# EAGLE board electric_sheep-v11 (EAGLE 5.11)
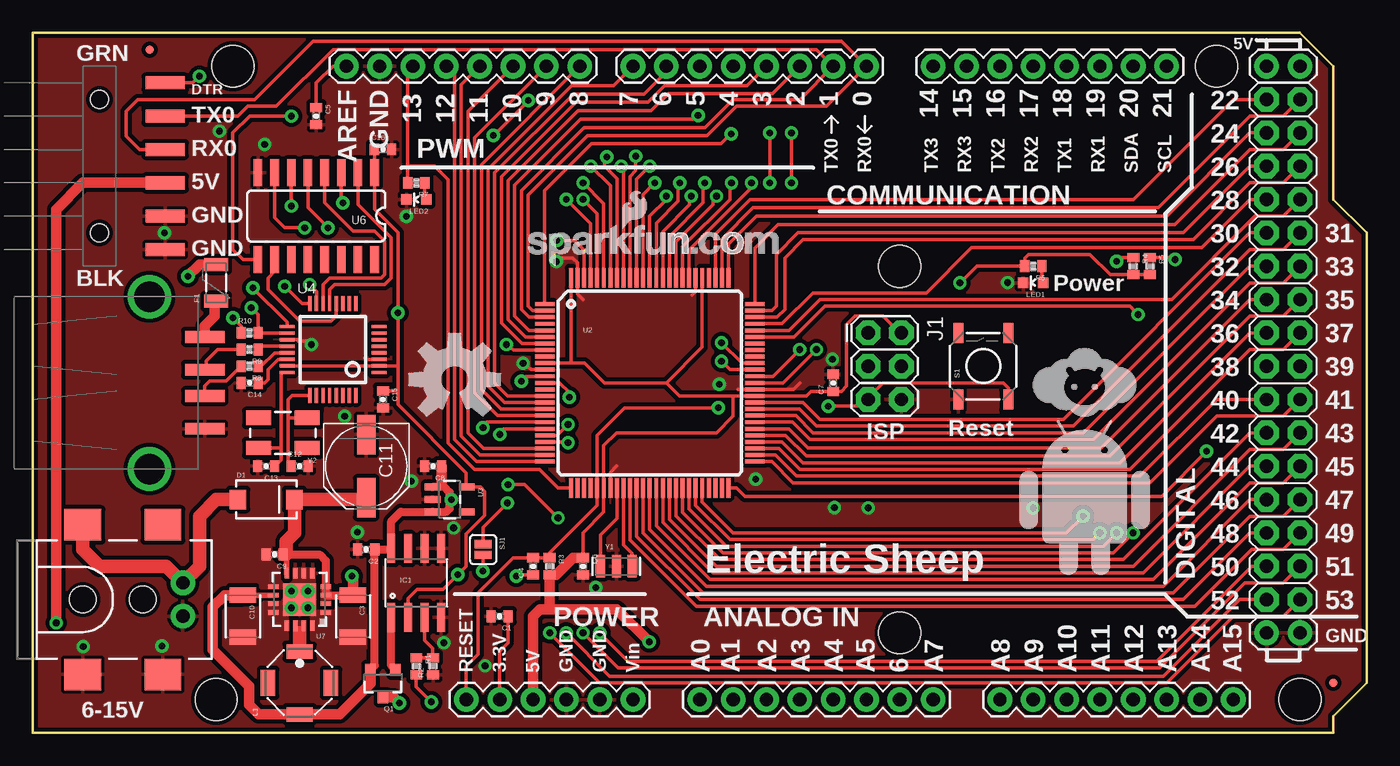
[diagram p0: board, top side]
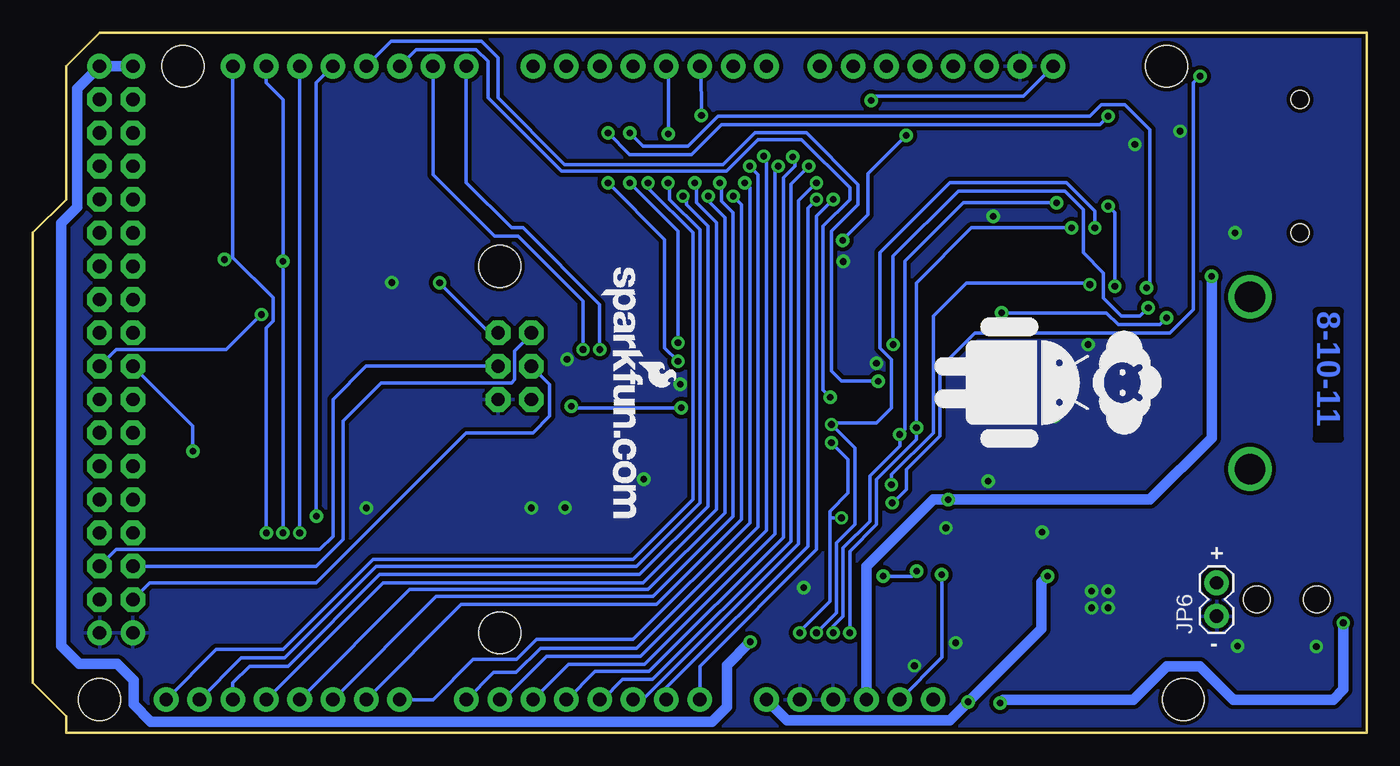
[diagram p1: board, bottom side, seen from below]

Size 101.6 x 53.34 mm. Coordinates in mm from the lower left corner, seen from the top.
Copper layers (1*16): Top 0.035mm / dielectric 1.5mm / Bottom 0.035mm
Design rules "SparkFun": minimum track width 8mil, minimum drill 20mil, track to track 8mil, track to pad 8mil, pad to pad 8mil, via to via 8mil, smd to smd 8mil, copper to edge 8mil, drill to drill 8mil, minimum pad ring 12mil, minimum via ring 10mil, stop-mask expansion 4mil, vias tented up to drill 20mil, thermal gap 10mil

## Footprints (pad centres in the part's own frame; a part is rotated, then mirrored left to right if it is on the bottom)
0402-CAP = smd 0.7 x 0.9: 1 -0.65,0; 2 0.65,0
1210 = smd 1.2 x 2: 1 -1.6,0; 2 1.6,0
PANASONIC_D = smd 3 x 1.4: + 2.4,0; - -2.4,0
SMA-DIODE = smd 1.27 x 1.47: A -2.15,0; C 2.15,0
PTC-1206 = smd 1 x 1.8: 1 -1.4,0; 2 1.4,0
SO08 = smd 0.61 x 2.21: 1 -1.905,-2.616; 2 -0.635,-2.616; 3 0.635,-2.616; 4 1.905,-2.616; 5 1.905,2.616; 6 0.635,2.616; 7 -0.635,2.616; 8 -1.905,2.616
2X3 = drill 1.016 pad 1.88 octagon: 1 0,0; 2 0,2.54; 3 2.54,0; 4 2.54,2.54; 5 5.08,0; 6 5.08,2.54
POWER_JACK_SMD = smd 2.8 x 2.4: GND 0,-5.7; P$4 6.1,-5.7; VIN0 0,5.7; VIN1 6.1,5.7 | hole 2.032: 0,0; 4.572,0
1X06-SMD = smd 1 x 3: 1 -6.35,5; 2 -3.81,5; 3 -1.27,5; 4 1.27,5; 5 3.81,5; 6 6.35,5 | hole 1.4: -5.08,0; 5.08,0
FIDUCIAL-1X2.5 = smd 0.635 x 0.635: 1 0,0
1X02 = drill 1.016 pad 1.88 round: 1 0,0; 2 2.54,0
SRU5028 = smd 1.1 x 2: 1 2.4,0; 2 -2.4,0 | smd 2 x 1.1: P$1 0,2.4; P$2 0,-2.4
LED-0603 = smd 0.8 x 0.8: A 0,-0.75; C 0,0.75
SOT23-3 = smd 0.8 x 0.9: 1 -0.95,-1; 2 0.95,-1; 3 0,1.1
0402-RES = smd 0.7 x 0.9: 1 -0.65,0; 2 0.65,0
TACTILE_SWITCH_SMD = smd 1.524 x 0.762: 1 -2.54,1.905; 2 2.54,1.905; 3 -2.54,-1.905; 4 2.54,-1.905
SJ_2S = smd 0.635 x 1.27: 1 -0.412,0; 2 0.412,0
ARDUINO_MEGA = drill 1.016 pad 1.88 round: 0 63.5,50.8; 1 60.96,50.8; 2 58.42,50.8; 3 55.88,50.8; 3.3V 35.56,2.54; 4 53.34,50.8; 5 50.8,50.8; 5V@0 38.1,2.54; 5V@1 93.98,50.8; 5V@2 96.52,50.8; 6 48.26,50.8; 7 45.72,50.8; 8 41.656,50.8; 9 39.116,50.8; 10 36.576,50.8; 11 34.036,50.8; 12 31.496,50.8; 13 28.956,50.8; 14 68.58,50.8; 15 71.12,50.8; 16 73.66,50.8; 17 76.2,50.8; 18 78.74,50.8; 19 81.28,50.8; 20 83.82,50.8; 21 86.36,50.8; A0 50.8,2.54; A1 53.34,2.54; A2 55.88,2.54; A3 58.42,2.54; A4 60.96,2.54; A5 63.5,2.54; A6 66.04,2.54; A7 68.58,2.54; A8 73.66,2.54; A9 76.2,2.54; A10 78.74,2.54; A11 81.28,2.54; A12 83.82,2.54; A13 86.36,2.54; A14 88.9,2.54; A15 91.44,2.54; AREF 23.876,50.8; GND@0 40.64,2.54; GND@1 43.18,2.54; GND@2 93.98,7.62; GND@3 96.52,7.62; GND@4 26.416,50.8; RESET 33.02,2.54; VIN 45.72,2.54 | drill 1.016 pad 1.88 octagon: 22 93.98,48.26; 23 96.52,48.26; 24 93.98,45.72; 25 96.52,45.72; 26 93.98,43.18; 27 96.52,43.18; 28 93.98,40.64; 29 96.52,40.64; 30 93.98,38.1; 31 96.52,38.1; 32 93.98,35.56; 33 96.52,35.56; 34 93.98,33.02; 35 96.52,33.02; 36 93.98,30.48; 37 96.52,30.48; 38 93.98,27.94; 39 96.52,27.94; 40 93.98,25.4; 41 96.52,25.4; 42 93.98,22.86; 43 96.52,22.86; 44 93.98,20.32; 45 96.52,20.32; 46 93.98,17.78; 47 96.52,17.78; 48 93.98,15.24; 49 96.52,15.24; 50 93.98,12.7; 51 96.52,12.7; 52 93.98,10.16; 53 96.52,10.16 | hole 3.2: 15.24,50.8; 13.97,2.54; 66.04,35.56; 66.04,7.62; 90.17,50.8; 96.52,2.54
TQFP100 = smd 1.5 x 0.3: 1 -8,6; 2 -8,5.5; 3 -8,5; 4 -8,4.5; 5 -8,4; 6 -8,3.5; 7 -8,3; 8 -8,2.5; 9 -8,2; 10 -8,1.5; 11 -8,1; 12 -8,0.5; 13 -8,0; 14 -8,-0.5; 15 -8,-1; 16 -8,-1.5; 17 -8,-2; 18 -8,-2.5; 19 -8,-3; 20 -8,-3.5; 21 -8,-4; 22 -8,-4.5; 23 -8,-5; 24 -8,-5.5; 25 -8,-6; 51 8,-6; 52 8,-5.5; 53 8,-5; 54 8,-4.5; 55 8,-4; 56 8,-3.5; 57 8,-3; 58 8,-2.5; 59 8,-2; 60 8,-1.5; 61 8,-1; 62 8,-0.5; 63 8,0; 64 8,0.5; 65 8,1; 66 8,1.5; 67 8,2; 68 8,2.5; 69 8,3; 70 8,3.5; 71 8,4; 72 8,4.5; 73 8,5; 74 8,5.5; 75 8,6 | smd 0.3 x 1.5: 26 -6,-8; 27 -5.5,-8; 28 -5,-8; 29 -4.5,-8; 30 -4,-8; 31 -3.5,-8; 32 -3,-8; 33 -2.5,-8; 34 -2,-8; 35 -1.5,-8; 36 -1,-8; 37 -0.5,-8; 38 0,-8; 39 0.5,-8; 40 1,-8; 41 1.5,-8; 42 2,-8; 43 2.5,-8; 44 3,-8; 45 3.5,-8; 46 4,-8; 47 4.5,-8; 48 5,-8; 49 5.5,-8; 50 6,-8; 76 6,8; 77 5.5,8; 78 5,8; 79 4.5,8; 80 4,8; 81 3.5,8; 82 3,8; 83 2.5,8; 84 2,8; 85 1.5,8; 86 1,8; 87 0.5,8; 88 0,8; 89 -0.5,8; 90 -1,8; 91 -1.5,8; 92 -2,8; 93 -2.5,8; 94 -3,8; 95 -3.5,8; 96 -4,8; 97 -4.5,8; 98 -5,8; 99 -5.5,8; 100 -6,8
SOT23-5 = smd 0.55 x 1.2: 1 -0.95,-1.3; 2 0,-1.3; 3 0.95,-1.3; 4 0.95,1.3; 5 -0.95,1.3
TQFP32-5MM = smd 1.143 x 0.254: 1 -3.5,1.75; 2 -3.5,1.25; 3 -3.5,0.75; 4 -3.5,0.25; 5 -3.5,-0.25; 6 -3.5,-0.75; 7 -3.5,-1.25; 8 -3.5,-1.75; 17 3.5,-1.75; 18 3.5,-1.25; 19 3.5,-0.75; 20 3.5,-0.25; 21 3.5,0.25; 22 3.5,0.75; 23 3.5,1.25; 24 3.5,1.75 | smd 0.254 x 1.143: 9 -1.75,-3.5; 10 -1.25,-3.5; 11 -0.75,-3.5; 12 -0.25,-3.5; 13 0.25,-3.5; 14 0.75,-3.5; 15 1.25,-3.5; 16 1.75,-3.5; 25 1.75,3.5; 26 1.25,3.5; 27 0.75,3.5; 28 0.25,3.5; 29 -0.25,3.5; 30 -0.75,3.5; 31 -1.25,3.5; 32 -1.75,3.5
SO016 = smd 0.66 x 2.032: 1 -4.445,-3.315; 2 -3.175,-3.315; 3 -1.905,-3.315; 4 -0.635,-3.315; 5 0.635,-3.315; 6 1.905,-3.315; 7 3.175,-3.315; 8 4.445,-3.315; 9 4.445,3.315; 10 3.175,3.315; 11 1.905,3.315; 12 0.635,3.315; 13 -0.635,3.315; 14 -1.905,3.315; 15 -3.175,3.315; 16 -4.445,3.315
QFN16-4X4 = smd 0.8 x 0.35: 1 -2,0.975; 2 -2,0.325; 3 -2,-0.325; 4 -2,-0.975; 9 2,-0.975; 10 2,-0.325; 11 2,0.325; 12 2,0.975 | smd 0.35 x 0.8: 5 -0.975,-2; 6 -0.325,-2; 7 0.325,-2; 8 0.975,-2; 13 0.975,2; 14 0.325,2; 15 -0.325,2; 16 -0.975,2 | smd 2.5 x 2.5: EXP 0,0
USB-A-S-NOSILK-FEMALE = smd 3 x 0.9: D+ 4.212,-1; D- 4.212,1; GND 4.212,-3.5; VBUS 4.212,3.5 | drill 2.311 round: P$5 0,-6.566; P$6 0,6.566
RESONATOR-SMD = smd 0.7 x 1.7: 1 -1.2,0; 2 0,0; 3 1.2,0
CRYSTAL-SMD-5X3 = smd 1.9 x 1.1: 1 -1.85,-1.15; 2 1.85,-1.15; 3 1.85,1.15; 4 -1.85,1.15

## Placement (x,y rotation side)
C1  1uF  [0402-CAP]  35.56,8.89 180 top
C2  0.1uF  [0402-CAP]  25.4,13.97 180 top
C3  10uF  [1210]  24.38,8.89 270 top
C4  0.1uF  [0402-CAP]  38.1,12.7 90 top
C5  0.1uF  [0402-CAP]  21.59,46.99 270 top
C6  0.1uF  [0402-CAP]  41.91,12.7 270 top
C7  0.1uF  [0402-CAP]  60.96,26.67 90 top
C8  0.1uF  [0402-CAP]  30.48,20.32 180 top
C9  1uF  [0402-CAP]  18.41,13.59 180 top
C10  22uF  [1210]  16,8.89 270 top
C11  47uF  [PANASONIC_D]  25.4,20.32 270 top
C12  18pF  [0402-CAP]  20.32,20.32 0 top
C13  18pF  [0402-CAP]  17.78,20.32 180 top
C14  0.1uF  [0402-CAP]  16.51,26.67 180 top
C15  0.1uF  [0402-CAP]  26.67,25.4 270 top
C16  0.1uF  [0402-CAP]  26.67,44.45 0 top
D1  MBRA140  [SMA-DIODE]  17.78,17.78 0 top
F1  PTCSMD  [PTC-1206]  13.97,34.29 90 top
IC1  OPAMP-DUALU  [SO08]  29.21,11.43 0 top
J1  AVR_SPI_PRG_6PTH  [2X3]  63.63,30.48 270 top
J2  POWER_JACKSMD  [POWER_JACK_SMD]  3.81,10.16 0 top
JP1  FTDI  [1X06-SMD]  5.08,43.18 270 top
JP2  LOGO-SFENEW  [SFE-NEW-WEBLOGO]  37.72,35.56 0 top
JP3  LOGO-SFENEW  [SFE-NEW-WEBLOGO]  58.29,35.43 270 bottom
JP4  FIDUCIAL1X2.5  [FIDUCIAL-1X2.5]  8.89,52.07 0 top
JP5  FIDUCIAL1X2.5  [FIDUCIAL-1X2.5]  99.06,3.81 0 top
JP6  External  [1X02]  11.43,8.89 90 bottom
L1  10uH/1.8A  [SRU5028]  20.32,3.81 90 top
LED1  green  [LED-0603]  76.2,34.29 90 top
LED2  yellow  [LED-0603]  29.21,40.64 90 top
Q1  MOSFET-PCHANNELSMD  [SOT23-3]  26.67,3.81 180 top
R1  10k  [0402-RES]  29.21,5.08 270 top
R2  10k  [0402-RES]  30.48,5.08 90 top
R3  10k  [0402-RES]  39.37,12.7 270 top
R4  10k  [0402-RES]  83.82,35.56 270 top
R5  10k  [0402-RES]  85.09,35.56 270 top
R6  470  [0402-RES]  76.2,35.56 180 top
R7  470  [0402-RES]  29.21,41.91 180 top
R8  33  [0402-RES]  16.51,27.94 180 top
R9  33  [0402-RES]  16.51,29.21 180 top
R10  2.2k  [0402-RES]  16.51,30.48 0 top
S1  SWITCH-MOMENTARY-2SMD  [TACTILE_SWITCH_SMD]  72.39,27.94 90 top
SJ1  SOLDERJUMPERNC  [SJ_2S]  34.29,13.97 270 top
U1  ARDUINO-MEGAFULL  [ARDUINO_MEGA]  0,0 0 top
U2  ATMEGA2560AU  [TQFP100]  46.99,26.67 0 top
U3  V_REG_LDOSMD  [SOT23-5]  31.75,17.78 270 top
U4  MAX3421ESMD  [TQFP32-5MM]  22.86,29.21 180 top
U6  HEX_CONVERTER  [SO016]  21.59,39.37 180 top
U7  TPS6211  [QFN16-4X4]  20.32,10.16 180 top
U$1  OSHW-LOGOL  [OSHW-LOGO-L]  32.13,26.92 0 top
U$14  ANDROID-ELECTRIC_SHEEP_LOGO_  [ANDROID-ELECTRIC_SHEEP_LOGO]  33.02,31.75 270 bottom
U$15  ANDROID-ELECTRIC_SHEEP_LOGO_  [ANDROID-ELECTRIC_SHEEP_LOGO]  75.06,11.94 0 top
X1  USB-A-SMD  [USB-A-S-NOSILK-FEMALE]  8.89,26.67 0 top
Y1  RESONATORSMD  [RESONATOR-SMD]  44.45,12.7 0 top
Y2  12MHz  [CRYSTAL-SMD-5X3]  19.05,22.86 180 top

## Library data of the parts
C1-C16 D1 F1 IC1 J1 J2 JP1-JP3 JP6 L1 LED1 LED2 Q1 R1-R10 S1 SJ1 U1-U4 U6 U7 U$1 U$14 U$15 X1 Y1 Y2 = SparkFun
JP4 JP5 = abes

## Nets
3.3V: C1.1 C15.1 C16.1 IC1.2 R10.1 U1.3.3V U3.5 U4.2 U4.23 U6.1
5V: C2.1 C6.1 C7.1 C8.1 C10.1 F1.2 IC1.8 J1.2 L1.2 Q1.2 R3.2 R4.2 R5.2 R6.2 U1.5V@0 U1.5V@1 U1.5V@2 U2.10 U2.31 U2.61 U2.80 U2.100 U3.1 U3.3 U7.10
A0: U1.A0 U2.97
A1: U1.A1 U2.96
A2: U1.A2 U2.95
A3: U1.A3 U2.94
A4: U1.A4 U2.93
A5: U1.A5 U2.92
A6: U1.A6 U2.91
A7: U1.A7 U2.90
A8: U1.A8 U2.89
A9: U1.A9 U2.88
A10: U1.A10 U2.87
A11: U1.A11 U2.86
A12: U1.A12 U2.85
A13: U1.A13 U2.84
A14: U1.A14 U2.83
A15: U1.A15 U2.82
AREF: C5.1 U1.AREF U2.98
DTR: JP1.1 SJ1.1
GND: C1.2 C2.2 C3.2 C5.2 C6.2 C7.2 C8.2 C9.2 C10.2 C11.- C12.2 C13.2 C14.2 C15.2 C16.2 IC1.4 IC1.5 IC1.6 J1.6 J2.GND J2.P$4 JP1.5 JP1.6 JP6.1 LED1.C LED2.C R2.1 S1.1 U1.GND@0 U1.GND@1 U1.GND@2 U1.GND@3 U1.GND@4 U2.11 U2.32 U2.62 U2.81 U2.99 U3.2 U4.3 U4.19 U6.8 U7.1 U7.5 U7.6 U7.7 U7.9 U7.11 U7.12 U7.13 U7.16 U7.EXP X1.GND Y1.2
MOSI-3: U4.16 U6.6
N$1: IC1.3 R1.1 R2.2
N$2: LED1.A R6.1
N$3: LED2.A R7.1
N$4: C4.1 SJ1.2
N$5: IC1.1 Q1.1
N$11: L1.1 U7.14 U7.15
N$13: R8.1 U4.21
N$14: R9.1 U4.20
N$15: R9.2 X1.D-
N$16: R8.2 X1.D+
N$18: F1.1 X1.VBUS
N$19: C12.1 U4.25 Y2.1
N$20: C13.1 U4.24 Y2.3
N$73: U2.33 Y1.1
N$74: U2.34 Y1.3
PA0: U1.22 U2.78
PA1: U1.23 U2.77
PA2: U1.24 U2.76
PA3: U1.25 U2.75
PA4: U1.26 U2.74
PA5: U1.27 U2.73
PA6: U1.28 U2.72
PA7: U1.29 U2.71
PB0: U1.53 U2.19 U6.5
PB1: J1.3 U1.52 U2.20 U6.3
PB2: J1.4 U1.51 U2.21 U6.7
PB3: J1.1 U1.50 U2.22 U4.15
PB4: U1.10 U2.23
PB5: U1.11 U2.24
PB6: U1.12 U2.25
PB7: R7.2 U1.13 U2.26
PC0: U1.37 U2.53
PC1: U1.36 U2.54
PC2: U1.35 U2.55
PC3: U1.34 U2.56
PC4: U1.33 U2.57
PC5: U1.32 U2.58
PC6: U1.31 U2.59
PC7: U1.30 U2.60
PD7: U1.38 U2.50
PE3: U1.5 U2.5
PE4: U1.2 U2.6
PE5: U1.3 U2.7
PE6: R10.2 U2.8 U4.18
PG0: U1.41 U2.51
PG1: U1.40 U2.52
PG2: U1.39 U2.70
PG5: U1.4 U2.1
PH3: U1.6 U2.15
PH4: U1.7 U2.16
PH5: U1.8 U2.17
PH6: U1.9 U2.18
PJ2: U2.65 U6.9
PJ3: U2.66 U4.17
PL0: U1.49 U2.35
PL1: U1.48 U2.36
PL2: U1.47 U2.37
PL3: U1.46 U2.38
PL4: U1.45 U2.39
PL5: U1.44 U2.40
PL6: U1.43 U2.41
PL7: U1.42 U2.42
PWRIN: D1.A J2.VIN0 JP6.2
RES-3: U4.12 U6.10
RESET: C4.2 J1.5 R3.1 S1.3 U1.RESET U2.30
RX0: JP1.3 U1.0 U2.2
RX1: U1.19 U2.45
RX2: U1.17 U2.12
RX3: U1.15 U2.63
SCK-3: U4.13 U6.2
SCL: R5.1 U1.21 U2.43
SDA: R4.1 U1.20 U2.44
SS-3: U4.14 U6.4
TX0: JP1.2 U1.1 U2.3
TX1: U1.18 U2.46
TX2: U1.16 U2.13
TX3: U1.14 U2.64
USBVCC: JP1.4 Q1.3
VBCOMP: C14.1 U4.22
VIN: C3.1 C9.1 C11.+ D1.C R1.2 U1.VIN U7.2 U7.3 U7.4 U7.8

## Tracks (layer width: path | path; a pad name or v marks a point on that pad's centre or on a via)
3.3V  (via drill 0.51)
  Top 0.254: 26.02,42.7 C16.1 | 26.02,42.7 U6.1 | 26.02,42.7 26.02,39.89 27.81,38.1 v27.81,32 27.81,27.94 | C15.1 26.68,26.04 27.81,26.04 | C1.1 36.21,6.87 35.56,6.22 U1.3.3V | 27.81,26.04 27.81,27.94 | 27.81,26.04 27.81,25.02 33.02,19.81 33.02,18.76 U3.5 34.1,18.73 34.42,18.41 34.42,16.59 32.99,15.16 32.99,12.68 v32.38,12.06 31.24,10.92 29.26,10.92 28.57,10.24 IC1.2 | R10.1 15.86,31 v15.24,31.62 | 27.81,27.94 27.79,27.96 U4.2 U4.23
  Bottom 0.254: v27.81,32 19.81,32 18.92,31.11 15.75,31.11 v15.24,31.62 | U1.3.3V 32.36,5.74 32.36,12.04 v32.38,12.06
5V  (via drill 0.51)
  Top 0.203: 31.36,18.73 31.13,18.96
  Top 0.254: R5.2 R4.2 82.06,34.91 80.52,36.45 75.82,36.45 75.56,36.2 75.56,35.58 | 75.56,35.58 71.9,35.58 v70.61,34.29 | 40.97,28.17 42.04,28.17 43.54,26.67 48.26,26.67 | 48.26,26.67 49.26,25.67 53.34,25.67 | 48.26,26.67 50.99,29.4 U2.80 | C6.1 41.91,15.24 43.49,16.82 U2.31 43.49,21.9 44.45,22.86 52.07,22.86 53.34,24.13 53.34,25.67 | U2.100 40.99,28.19 40.97,28.17 | 40.97,28.17 U2.10 | 53.34,25.67 U2.61 58.91,25.67 59.26,26.02 C7.1 61.58,26.02 61.98,26.42 61.98,31.11 62.61,31.75 64.77,31.75 66.04,30.48 J1.2 | 31.75,18.34 31.75,17.91 v31.88,17.78 | 75.56,35.58 R6.2
  Top 0.406: U7.10 C10.1
  Top 0.61: U3.1 31.36,18.73 31.75,18.34 31.75,17.09 31.5,16.84 U3.3 | U3.3 | U3.3 28.02,16.84 27.3,16.13 IC1.8 27.23,13.97 C2.1 26.05,5.14 Q1.2
  Top 0.813: C6.1 41.16,13.35 39.86,12.05 R3.2 39.37,9.42 | F1.2 12.7,35.69 v11.81,34.8 | C10.1 14.6,10.48 13.72,9.6 13.72,6.33 16.48,3.56 16.48,2.13 17.21,1.41 L1.2 23.36,1.41 25.72,3.77 Q1.2 | 31.13,18.96 C8.1 | v46.97,6.93 44.48,9.42 39.37,9.42 | 39.37,9.42 38.63,9.42 38.1,8.89 U1.5V@0
  Bottom 0.254: v70.61,34.29 66.8,30.48 J1.2
  Bottom 0.813: U1.5V@1 U1.5V@2 98.22,49.1 98.22,40.06 99.44,38.84 99.44,6.63 98.07,5.26 95.17,5.26 93.93,4.01 93.93,2.18 92.61,0.86 49.89,0.86 48.74,2.01 48.74,5.16 v46.97,6.93 | v11.81,34.8 11.81,22.48 16.51,17.78 v31.88,17.78 33.02,17.78 38.1,12.7 U1.5V@0
A0  (via drill 0.51)
  Top 0.254: U2.97 42.49,38.79 v40.64,40.64
  Bottom 0.254: U1.A0 50.8,5.08 41.91,13.97 41.91,39.37 v40.64,40.64
A1  (via drill 0.51)
  Top 0.254: U2.96 42.99,39.56 v41.91,40.64
  Bottom 0.254: U1.A1 53.34,3.45 42.57,14.22 42.57,39.98 v41.91,40.64
A2  (via drill 0.51)
  Top 0.254: U2.95 43.49,40.33 v41.91,41.91
  Bottom 0.254: U1.A2 55.14,2.54 43.28,14.4 43.28,40.54 v41.91,41.91
A3  (via drill 0.51)
  Top 0.254: U2.94 43.99,41.68 v42.49,43.18
  Bottom 0.254: U1.A3 58.19,2.54 56.67,4.06 54.41,4.06 43.87,14.61 43.87,41.81 v42.49,43.18
A4  (via drill 0.51)
  Top 0.254: U2.93 44.49,42.23 43.54,43.18 43.54,43.71 v43.71,43.89
  Bottom 0.254: U1.A4 60.91,2.54 58.78,4.67 54.66,4.67 44.42,14.91 44.42,42.29 43.54,43.18 43.54,43.71 v43.71,43.89
A5  (via drill 0.51)
  Top 0.254: U2.92 44.99,43.02 v44.83,43.18
  Bottom 0.254: U1.A5 60.81,5.23 55.02,5.23 45.09,15.16 45.09,42.93 v44.83,43.18
A6  (via drill 0.51)
  Top 0.254: U2.91 45.49,42.39 45.92,42.82 v45.92,43.94
  Bottom 0.254: U1.A6 65.79,2.54 62.48,5.84 55.32,5.84 45.72,15.44 45.72,43.74 v45.92,43.94
A7  (via drill 0.51)
  Top 0.254: U2.90 45.99,42.18 v46.99,43.18
  Bottom 0.254: U1.A7 68.56,2.54 66.5,4.6 64.8,4.6 62.94,6.45 55.6,6.45 46.35,15.7 46.35,42.55 v46.99,43.18
A8  (via drill 0.51)
  Top 0.254: U2.89 46.49,41.03 v47.37,41.91
  Bottom 0.254: U1.A8 71.12,2.54 68.07,5.59 64.77,5.59 63.25,7.11 55.88,7.11 46.99,16 46.99,41.53 v47.37,41.91
A9  (via drill 0.51)
  Top 0.254: U2.88 46.99,39.37 48.26,40.64 v48.26,40.89
  Bottom 0.254: U1.A9 68.96,9.78 54.1,9.78 47.62,16.26 47.62,40.26 v48.26,40.89
A10  (via drill 0.51)
  Top 0.254: U2.87 47.49,38.85 49.15,40.51 49.15,41.78 v49.28,41.91
  Bottom 0.254: U1.A10 70.87,10.41 54.36,10.41 48.26,16.51 48.26,39.62 49.15,40.51 49.15,41.78 v49.28,41.91
A11  (via drill 0.51)
  Top 0.254: U2.86 47.99,38.21 50.04,40.26 50.04,40.77 v50.16,40.89
  Bottom 0.254: U1.A11 72.9,10.92 54.74,10.92 48.9,16.76 48.9,39.24 50.04,40.39 50.04,40.77 v50.16,40.89
A12  (via drill 0.51)
  Top 0.254: U2.85 48.49,37.82 51.05,40.39 51.05,41.78 v51.18,41.91
  Bottom 0.254: U1.A12 74.93,11.43 55.12,11.43 49.53,17.02 49.53,38.86 51.05,40.39 51.05,41.78 v51.18,41.91
A13  (via drill 0.51)
  Top 0.254: U2.84 48.99,37.43 51.82,40.26 51.82,40.64 v52.07,40.89
  Bottom 0.254: U1.A13 86.36,3.81 85.09,5.08 82.17,5.08 75.18,12.06 55.37,12.06 50.16,17.27 50.16,38.61 51.82,40.26 51.82,40.64 v52.07,40.89
A14  (via drill 0.51)
  Top 0.254: U2.83 49.49,37.04 53.09,40.64 53.09,41.78 v53.21,41.91
  Bottom 0.254: U1.A14 85.72,5.71 82.42,5.71 75.44,12.7 55.63,12.7 50.8,17.53 50.8,38.35 53.09,40.64 53.09,41.78 v53.21,41.91
A15  (via drill 0.51)
  Top 0.254: U2.82 49.99,36.78 54.74,41.53 v54.74,41.91
  Bottom 0.254: U1.A15 87.63,6.35 82.55,6.35 75.69,13.21 55.88,13.21 51.31,17.78 51.31,38.1 54.61,41.4 54.61,41.78 v54.74,41.91
AREF  (via drill 0.51)
  Top 0.254: 40.18,37.52 v39.9,37.52 41.27,37.52 41.99,36.8 U2.98 | C5.1 21.59,49.53 22.86,50.8 U1.AREF | v37.74,48.18 v35.08,45.52
  Bottom 0.254: v39.9,37.52 39.9,37.57 37.97,39.5 37.97,42.62 v35.08,45.52 | U1.AREF 26.16,48.51 37.41,48.51 v37.74,48.18
DTR  (via drill 0.51)
  Top 0.254: SJ1.1 34.29,15.67 v36.14,17.53 | JP1.1 12.19,49.53 v12.7,50.04
  Bottom 0.254: v36.14,17.53 36.07,17.53 35.05,18.54 35.05,20.07 32.51,22.61 32.51,27.81 29.84,30.48 14.99,30.48 13.21,32.26 13.21,49.53 v12.7,50.04
GND  (via drill 0.51)
  Top 0.254: U2.32 43.99,19.86 44.45,20.32 | 53.72,26.16 53.73,26.17 U2.62 57.92,26.17 58.42,26.67 | 41.91,33.02 41.49,33.44 U2.99 41.49,35.83 41.12,36.2 40.31,36.2 40.11,35.99 40.08,35.99 40.01,35.92 | U2.81 50.49,33.62 50.22,33.35 | U2.11 37.96,27.67 v37.34,28.17 | U4.19 20.08,29.96 20.19,29.84 21.08,29.84 v21.21,29.59 | U4.3 25.39,28.46 25.27,28.57
  other vias: 34.44,5.11 39.88,35.92 42.88,11.07 55.07,19.33 74.24,34.32 60.91,28.47 63.63,17.14 61.06,17.17 76.2,17.14 28.45,39.34 52.27,26.57 23.75,24.13 17.65,44.83 10.03,38.1 14.22,45.85 19.68,10.79 20.95,10.79 19.68,9.53 20.95,9.53 3.84,6.58 9.83,6.6 32.05,15.62 28.83,19.18 31.32,6.86 24.71,15.29
  pour Bottom (isolate 0.305): 0,53.34 100.33,53.34 101.6,52.07 101.6,1.27 100.33,0 0,0
  pour Top (isolate 0.305): 0,53.34 100.33,53.34 101.6,52.07 101.6,1.27 100.33,0 0,0
  pour Top (no thermals): 19.86,12.52 19.86,11.61 19.63,11.38 19.63,10.82 19.76,10.69 20.9,10.69 21.46,11.25 21.46,12.52
  pour Top (no thermals): 19.23,11 17.4,11 17.3,11.1 17.3,12.14 16.74,12.7 16.74,14.48 16.89,14.63 17.91,14.63 18.16,14.38 18.16,13.23 18.8,12.6 18.8,11.68 19.23,11.25
  pour Top (no thermals): 19.2,9.98 17.58,9.98 17.12,9.53 16.1,9.53 14.63,8.05 14.63,6.53 15.16,5.99 18.03,5.99 19.15,7.11 19.41,7.11 19.41,9.68
  pour Top (no thermals): 21.21,9.3 21.21,7.16 21.26,7.06 21.46,7.06 22.07,6.45 25.4,6.45 25.37,8.94 24.99,9.32
MOSI-3  (via drill 0.51)
  Top 0.254: v19.68,40.13 U6.6 | U4.16 20.5,32.71 v19.18,34.04
  Bottom 0.254: 19.56,40.01 v19.68,40.13 19.18,39.62 v19.18,34.04
N$1
  Top 0.254: IC1.3 29.84,7.04 30.45,6.43 30.45,5.75 R2.2 R1.1
N$2
  Top 0.254: R6.1 76.85,34.39 LED1.A
N$3
  Top 0.254: R7.1 29.86,40.74 LED2.A
N$4  (via drill 0.51)
  Top 0.254: C4.1 36.94,12.05 v36.83,11.94 | SJ1.2 34.29,12.34 v34.27,12.32
  Bottom 0.254: v36.83,11.94 34.65,11.94 v34.27,12.32
N$5
  Top 0.61: IC1.1 27.3,5.12 Q1.1
N$11
  Top 0.254: U7.14 20,7.95 20.32,7.62 20.64,7.95 U7.15
  Top 1.016: 20.32,7.62 L1.1
  pour Top (no thermals): 19.89,8.48 19.89,6.63 20.78,6.63 20.78,6.65 20.75,6.68 20.75,8.48
N$13
  Top 0.254: U4.21 18.42,28.96 17.4,27.94 R8.1
N$14
  Top 0.254: U4.20 17.41,29.46 R9.1
N$15
  Top 0.254: R9.2 14.1,29.21 13.21,28.32 13.21,27.78 X1.D-
N$16
  Top 0.254: X1.D+ 13.1,26.44 13.46,26.8 14.72,26.8 R8.2
N$18
  Top 0.406: 13.84,33.02 F1.1
  Top 0.813: X1.VBUS 13.1,31.01 13.84,31.75 13.84,33.02
N$19
  Top 0.254: U4.25 19.74,25.71 19.43,25.4 19.43,24 | 19.43,24 19.43,20.56 C12.1 | Y2.1 19.44,24.01 19.43,24
N$20
  Top 0.254: U4.24 18.95,27.46 18.92,27.43 18.92,21.59 | 18.92,21.59 18.92,20.81 C13.1 | Y2.3 18.8,21.71 18.92,21.59
N$73
  Top 0.203: Y1.1 43.23,12.72
  Top 0.254: U2.33 44.49,16.35 43.23,15.09 43.23,12.72
N$74
  Top 0.254: U2.34 44.99,14.32 45.65,13.66 Y1.3
PA0
  Top 0.254: U2.78 51.99,38.02 54.61,40.64 83.82,40.64 91.44,48.26 U1.22
PA1
  Top 0.254: U2.77 52.49,37.63 54.86,40.01 85.72,40.01 92.71,46.99 95.25,46.99 U1.23
PA2
  Top 0.254: U2.76 52.99,37.24 55.12,39.37 86.36,39.37 92.71,45.72 U1.24
PA3
  Top 0.254: U2.75 54.99,36.96 56.77,38.73 87,38.73 92.71,44.45 95.25,44.45 U1.25
PA4
  Top 0.254: U2.74 56.3,32.17 56.64,32.51 56.64,36.45 58.29,38.1 87.63,38.1 92.71,43.18 U1.26
PA5
  Top 0.254: U2.73 56.69,31.67 57.28,32.26 57.28,36.2 58.67,37.59 88.39,37.59 92.71,41.91 95.25,41.91 U1.27
PA6
  Top 0.254: U2.72 57.08,31.17 59.44,33.53 68.07,33.53 71.5,36.96 89.03,36.96 92.71,40.64 U1.28
PA7
  Top 0.254: U2.71 57.59,30.67 59.94,33.02 86.74,33.02 93.09,39.37 95.25,39.37 U1.29
PB0  (via drill 0.51)
  Top 0.254: U2.19 34.59,23.67 v34.29,23.24 | U1.53 95.25,8.89 91.44,8.89 86.36,3.81 43.18,3.81 v39.37,7.62 | U6.5 20.95,40.01 v22.48,38.48
  Bottom 0.254: v39.37,7.62 39.37,13.84 37.34,15.88 37.34,19.3 34.29,22.35 v34.29,23.24 34.29,34.29 30.1,38.48 v22.48,38.48
PB1  (via drill 0.51)
  Top 0.254: U2.20 35.87,23.17 v35.56,22.73 | U1.52 91.95,10.16 86.11,4.32 43.94,4.32 v40.64,7.62 | U6.3 23.5,40.64 v23.62,40.39
  Bottom 0.254: v40.64,7.62 40.64,8.13 39.88,8.89 39.88,14.1 37.85,16.13 37.85,19.56 35.56,21.84 v35.56,22.73 35.18,23.11 35.18,35.94 30.73,40.39 v23.62,40.39 | J1.3 62.23,26.54 62.23,24.13 63.5,22.86 68.58,22.86 80.01,11.43 92.71,11.43 U1.52
PB2  (via drill 0.51)
  Top 0.254: U2.21 39.94,22.67 v40.77,23.5 | U1.51 95.25,11.43 92.33,11.43 85.85,4.95 44.58,4.95 v41.91,7.62 | U6.7 18.41,39.24 19.18,38.48 v20.7,38.48
  Bottom 0.254: v41.91,7.62 40.39,9.14 40.39,14.48 38.99,15.88 38.99,21.72 v40.77,23.5 40.64,23.62 37.34,23.62 36.2,24.77 36.2,28.45 37.08,29.34 37.08,36.58 31.75,41.91 30.1,41.91 29.21,41.91 22.86,41.91 20.7,39.75 v20.7,38.48 | J1.4 76.2,27.94 78.74,25.4 78.74,14.99 79.76,13.97 95.25,13.97 U1.51
PB3  (via drill 0.51)
  Top 0.254: U2.22 40.7,22.17 v40.77,22.1 | U1.50 92.84,12.7 85.6,5.46 45.34,5.46 v43.18,7.62 | v36.2,18.92 37.47,18.92 v40.01,16.38 | U4.15 21.61,33.63 v21.08,34.16
  Bottom 0.254: v40.77,22.1 39.5,20.83 39.5,18.29 40.89,16.89 40.89,16.51 | v43.18,7.62 43.18,7.75 40.89,10.03 40.89,16.51 | J1.1 63.63,30.35 64.9,29.08 64.9,26.92 65.15,26.67 75.06,26.67 77.98,23.75 77.98,14.73 80.01,12.7 U1.50 | v40.01,16.38 40.77,16.38 40.89,16.51 | v36.2,18.92 36.2,19.68 33.02,22.86 33.02,31.75 30.48,34.29 21.21,34.29 v21.08,34.16
PB4
  Top 0.254: 36.55,50.77 U1.10 34.29,48.51 34.06,48.28 33.15,47.37 33.15,22.86 34.34,21.67 U2.23
PB5
  Top 0.254: U2.24 34.08,21.17 32.64,22.61 32.64,49.4 U1.11
PB6
  Top 0.254: U1.12 32.13,50.16 32.13,22.35 33.81,20.67 U2.25
PB7
  Top 0.254: 28.56,43.05 R7.2 | 28.56,43.05 28.56,50.4 U1.13 | U2.26 40,18.67 38.61,20.07 33.66,20.07 31.62,22.1 31.62,42.16 30.61,43.18 28.69,43.18 28.56,43.05
PC0
  Top 0.254: U2.53 56.82,21.67 58.42,20.07 83.57,20.07 92.71,29.21 95.25,29.21 U1.37
PC1
  Top 0.254: U2.54 57.08,22.17 58.67,20.57 82.8,20.57 92.71,30.48 U1.36
PC2
  Top 0.254: U2.55 57.34,22.67 58.93,21.08 82.04,21.08 92.71,31.75 95.25,31.75 U1.35
PC3
  Top 0.254: U2.56 57.6,23.17 59.05,21.72 81.41,21.72 92.71,33.02 U1.34
PC4
  Top 0.254: U2.57 57.86,23.67 59.18,22.35 80.77,22.35 92.71,34.29 95.25,34.29 U1.33
PC5
  Top 0.254: U2.58 58.13,24.17 59.44,22.86 80.01,22.86 92.71,35.56 U1.32
PC6
  Top 0.254: U2.59 58.39,24.67 59.69,23.37 79.25,23.37 92.71,36.83 95.25,36.83 U1.31
PC7
  Top 0.254: U2.60 58.65,25.17 59.94,23.88 78.49,23.88 92.71,38.1 U1.30
PD7  (via drill 0.51)
  Top 0.254: U2.50 53.59,18.67 54.23,18.03 85.98,18.03 v89.41,21.46
  Bottom 0.254: v89.41,21.46 89.41,23.37 U1.38
PE3  (via drill 0.51)
  Top 0.254: v50.67,47.04 50.67,47.02 50.42,46.76 41.73,46.76 36.7,41.73 36.7,31.75 37.78,30.67 U2.5
  Bottom 0.254: v50.67,47.04 50.72,50.72 U1.5
PE4
  Top 0.254: U1.2 56.34,48.72 48.41,48.72 47.09,47.4 41.53,47.4 37.07,42.94 36.96,42.82 36.2,42.06 36.2,31.5 37.52,30.17 U2.6
PE5
  Top 0.254: U1.3 54.41,49.33 48.13,49.33 46.86,48.06 41.38,48.06 35.69,42.37 35.69,31.24 37.26,29.67 U2.7
PE6  (via drill 0.51)
  Top 0.254: U4.18 17.18,30.46 R10.2 17.16,31.86 v16.64,32.38 | U2.8 36.62,29.17 v36.07,29.59
  Bottom 0.254: v36.07,29.59 36.07,36.32 31.11,41.27 22.99,41.27 21.59,39.88 21.59,36.58 20.07,35.05 20.07,33.15 18.67,31.75 17.27,31.75 v16.64,32.38
PG0
  Top 0.254: U2.51 56.29,20.67 57.91,19.05 85.09,19.05 90.17,24.13 95.25,24.13 U1.41
PG1
  Top 0.254: U2.52 56.55,21.17 58.17,19.56 84.33,19.56 90.17,25.4 U1.40
PG2  (via drill 0.51)
  Top 0.254: U2.70 57.98,30.17 60.33,32.51 83.57,32.51 v84.2,31.88
  Bottom 0.254: U1.39 95.25,29.21 86.87,29.21 v84.2,31.88
PG5  (via drill 0.51)
  Top 0.254: U2.1 38.99,41.3 42.57,44.88 52.43,44.88 v53.19,45.64
  Bottom 0.254: U1.4 53.19,50.65 v53.19,45.64
PH3
  Top 0.254: 48.18,50.29 48.26,50.22 | 48.18,50.29 48.18,50.72 U1.6 | 48.18,50.29 46.56,48.67 41.17,48.67 35.18,42.67 35.18,26.67 36.18,25.67 U2.15
PH4
  Top 0.254: U1.7 44.25,49.33 41.05,49.33 34.67,42.95 34.67,26.42 35.92,25.17 U2.16
PH5
  Top 0.254: 41.68,50.77 U1.8 34.16,43.31 34.16,26.16 35.66,24.67 U2.17
PH6
  Top 0.254: 39.19,50.72 U1.9 33.66,45.34 33.66,25.91 35.39,24.17 U2.18
PJ2  (via drill 0.51)
  Top 0.254: U2.65 53.1,27.67 v52.45,28.32 | v57.78,45.72 v57.78,41.91 | v19.68,46.99 16.51,46.99 15.24,45.72 15.24,36.83 16.02,36.05 U6.9
  Bottom 0.254: v52.45,28.32 53.47,29.34 53.47,37.59 v57.78,41.91 | v19.68,46.99 20.32,46.35 49.15,46.35 51.44,44.07 56.13,44.07 v57.78,45.72
PJ3  (via drill 0.51)
  Top 0.254: U2.66 54,28.17 v52.45,29.72 | v56.13,45.72 v56.13,41.91 | U4.17 19.36,31.31 v16.76,33.91
  Bottom 0.254: v52.45,29.72 52.45,38.23 v56.13,41.91 | v56.13,45.72 55.12,44.7 51.69,44.7 49.4,46.99 21.08,46.99 20.19,47.88 18.41,47.88 16.51,45.97 16.51,34.16 v16.76,33.91
PL0
  Top 0.254: U2.35 45.49,14.71 50.55,9.65 88.52,9.65 92.84,13.97 95.25,13.97 U1.49
PL1
  Top 0.254: U2.36 45.99,14.97 50.8,10.16 87.63,10.16 92.71,15.24 U1.48
PL2
  Top 0.254: U2.37 46.49,15.23 51.05,10.67 86.87,10.67 92.71,16.51 95.25,16.51 U1.47
PL3
  Top 0.254: U2.38 46.99,15.49 51.31,11.18 86.11,11.18 92.71,17.78 U1.46
PL4
  Top 0.254: U2.39 47.49,15.76 51.56,11.68 85.34,11.68 92.71,19.05 95.25,19.05 U1.45
PL5
  Top 0.254: U2.40 47.99,16.02 51.82,12.19 84.58,12.19 92.71,20.32 U1.44
PL6
  Top 0.254: U2.41 48.49,16.28 52.07,12.7 83.82,12.7 92.71,21.59 95.25,21.59 U1.43
PL7
  Top 0.254: U2.42 48.99,16.54 52.32,13.21 83.06,13.21 92.71,22.86 U1.42
PWRIN
  Top 1.016: J2.VIN0 3.81,13.97 5.08,12.7 10.16,12.7 JP6.2 12.7,12.7 12.7,16.51 13.97,17.78 D1.A
RES-3
  Top 0.254: U4.12 23.11,31.75 22.73,31.37 20.32,31.37 17.91,33.78 17.91,34.67 18.41,35.18 U6.10
RESET  (via drill 0.51)
  Top 0.254: U1.RESET 33.02,5.08 33.91,5.97 33.91,10.67 36.59,13.35 C4.2 R3.1 39.37,13.72 42.99,17.34 U2.30 42.99,22.67 45.09,24.77 v52.2,24.77 | S1.3 74.3,26.29 73.91,26.67 64.77,26.67 63.63,25.53 J1.5 63.12,24.89 v60.58,24.89
  Bottom 0.254: v52.2,24.77 60.45,24.77 v60.58,24.89
RX0
  Top 0.254: U2.2 38.06,32.17 37.72,32.51 37.72,40.97 42.27,45.52 51.36,45.52 53.59,47.75 60.45,47.75 U1.0 61.59,52.7 21.34,52.7 16.89,48.26 8,48.26 7.11,47.37 7.11,45.47 8.13,44.45 JP1.3
RX1  (via drill 0.51)
  Top 0.254: U2.45 50.49,17.33 53.09,14.73 80.77,14.73 v81.28,15.24
  Bottom 0.254: v81.28,15.24 U1.19
RX2  (via drill 0.51)
  Top 0.254: U2.12 37.58,27.17 v37.21,26.8
  Bottom 0.254: U1.17 74.3,52.7 67.44,52.7 66.17,51.44 66.17,48.39 61.09,43.31 49.02,43.31 46.61,45.72 42.67,45.72 38.73,41.78 38.73,40.26 40.77,38.23 40.77,27.56 40.01,26.8 v37.21,26.8
RX3  (via drill 0.51)
  Top 0.254: U2.63 57.15,26.67 v59.69,29.21
  Bottom 0.254: v59.69,29.21 59.69,32.89 64.64,37.85 66.42,37.85 71.12,42.55 U1.15
SCK-3
  Top 0.254: U4.13 22.61,33.79 22.99,34.16 26.8,34.16 27.3,34.67 27.3,37.72 24.77,40.26 U6.2
SCL  (via drill 0.51)
  Top 0.254: U2.43 49.49,16.8 52.58,13.72 82.3,13.72 v83.82,15.24 | R5.1 86.85,36.21 v87,36.07
  Bottom 0.254: 86.36,36.21 U1.21 | v83.82,15.24 83.82,30.86 83.31,31.37 83.31,33.16 86.36,36.21 | 86.36,36.21 86.85,36.21 v87,36.07
SDA  (via drill 0.51)
  Top 0.254: U2.44 49.99,17.07 52.83,14.22 81.53,14.22 v82.55,15.24 | R4.1 82.82,36.21 v82.55,35.94
  Bottom 0.254: U1.20 83.82,49.53 82.55,48.26 v82.55,35.94 v82.55,15.24
SS-3
  Top 0.254: U4.14 22.11,34.17 22.61,34.67 26.54,34.67 26.8,34.92 26.8,37.47 26.04,38.23 24.38,38.23 22.23,40.39 U6.4
TX0
  Top 0.254: U2.3 37.8,31.67 37.21,32.26 37.21,41.33 41.99,46.1 51.18,46.1 53.34,48.26 58.42,48.26 U1.1 59.69,52.07 22.86,52.07 18.54,47.75 16.38,47.75 15.62,46.99 JP1.2
TX1  (via drill 0.51)
  Top 0.254: U2.46 50.99,17.59 53.34,15.24 78.74,15.24 v80.01,16.51
  Bottom 0.254: v80.01,16.51 80.01,49.53 U1.18
TX2  (via drill 0.51)
  Top 0.254: U2.13 40.13,26.67 40.87,25.93 v40.87,25.58
  Bottom 0.254: U1.16 72.39,52.07 67.82,52.07 66.93,51.18 66.93,48.39 61.34,42.8 48.77,42.8 46.35,45.21 43.05,45.21 39.37,41.53 39.37,40.64 41.4,38.61 41.4,26.11 v40.87,25.58
TX3  (via drill 0.51)
  Top 0.254: U2.64 56.38,27.17 v58.42,29.21
  Bottom 0.254: v58.42,29.21 58.42,32.64 64.26,38.48 65.15,38.48 68.58,41.91 U1.14
USBVCC  (via drill 0.51)
  Top 0.813: Q1.3 27.49,2.71 v27.91,2.29 | JP1.4 3.81,41.91 1.78,39.88 v1.78,8.38
  Bottom 0.813: v1.78,8.38 1.78,3.3 2.54,2.54 10.16,2.54 12.7,5.08 15.24,5.08 17.78,2.54 27.66,2.54 v27.91,2.29
VBCOMP
  Top 0.254: U4.22 18.68,28.46 17.91,27.69 17.91,26.92 17.65,26.67 C14.1
VIN  (via drill 0.51)
  Top 0.254: R1.2 29.21,3.5 v30.35,2.36
  Top 0.406: U7.8 19.34,13.56 C9.1
  Top 0.61: C9.1 21.84,13.59 22.32,13.11 U7.4 U7.3 C3.1
  Top 0.813: C3.1 24.38,11.86 v24.31,11.94
  Top 1.016: C11.+ 25.26,17.78 D1.C 19.93,15.23 19.3,14.61 19.3,13.6 C9.1
  Bottom 0.813: U1.VIN 45.72,2.52 44.17,0.96 31.75,0.96 v30.35,2.36 24.79,7.92 24.79,11.46 v24.31,11.94
  pour Top (no thermals): 22,11.25 22,9.75 22.66,9.75 22.66,11.28 22,11.28

## Text on the board
Bottom: 8-10-11
tPlace: GRN | DTR | TX0 | RX0 | 5V | GND | GND | BLK | Power | Reset | ISP | Electric Sheep | 6-15V
bPlace: + | -
tDocu: *330ohm on spi lines | *trimpot on USB VBUS